# EAGLE board Circuit Diagram for PHY494 (EAGLE 9.7.0)

Size 253.6 x 350.01 mm. Coordinates in mm from the lower left corner, seen from the top.
Outline: 0,0 253.6,0 253.6,350.01 0,350.01 0,0
Copper layers (1*16): Top 0.035mm / dielectric 1.5mm / Bottom 0.035mm
Design rules "default": minimum track width 6mil, minimum drill 0.35mm, track to track 6mil, track to pad 6mil, pad to pad 6mil, via to via 6mil, smd to smd 6mil, copper to edge 40mil, drill to drill 6mil, minimum pad ring 10mil, minimum via ring 8mil, stop-mask expansion 4mil, vias tented up to drill 0mil, thermal gap 10mil

## Footprints (pad centres in the part's own frame; a part is rotated, then mirrored left to right if it is on the bottom)
HC-SR04 = drill 1.016 long: 1 -3.81,0; 2 -1.27,0; 3 1.27,0; 4 3.81,0
WS2812-STRIP = drill 1.016 long: 1 -3.81,0; 2 -1.27,0; 3 1.27,0; 4 3.81,0
RESAD1016W63L850D250B = drill 0.83 pad 1.43: 1 -5.08,0; 2 5.08,0
HA-06-SM065 = drill 1 pad 1.676: 1 -2.54,-2.54; 2 0,2.54; 3 2.54,-2.54
SWITCH-MOMENTARY-PTH-6.5MM = drill 1.016 pad 1.88: 1 -3.251,2.261; 2 3.251,2.261; 3 -3.251,-2.261; 4 3.251,-2.261
ARDUINO-UNO-R3-SHIELD = drill 1.016 pad 1.88: 3.3V 24.13,-2.54; 5V 24.13,0; A0 24.13,12.7; A1 24.13,15.24; A2 24.13,17.78; A3 24.13,20.32; A4 24.13,22.86; A5 24.13,25.4; AREF -24.13,-13.97; D2 -24.13,20.32; D3 -24.13,17.78; D4 -24.13,15.24; D5 -24.13,12.7; D6 -24.13,10.16; D7 -24.13,7.62; D8 -24.13,3.81; D9 -24.13,1.27; D10 -24.13,-1.27; D11 -24.13,-3.81; D12 -24.13,-6.35; D13 -24.13,-8.89; GND@0 24.13,2.54; GND@1 24.13,5.08; GND@2 -24.13,-11.43; IOREF 24.13,-7.62; NC 24.13,-10.16; RES 24.13,-5.08; RX -24.13,25.4; SCL -24.13,-19.05; SDA -24.13,-16.51; TX -24.13,22.86; VIN 24.13,7.62

## Placement (x,y rotation side)
DIST1  DISTANCE-SENSOR-4PINHC-SR04  [HC-SR04]  159.4,22.23 0 top
LED1  WS2812B_STRIP  [WS2812-STRIP]  147.54,341.76 180 top
LEDPOTENTIOMETER_STRIP  WS2812B_STRIP  [WS2812-STRIP]  79.29,209.82 0 top
R1  10k  [RESAD1016W63L850D250B]  244.63,289.94 180 top
RING1  WS2812B_STRIP  [WS2812-STRIP]  234.21,290.45 0 top
RPOTMOTORIZED_POT  10k  [HA-06-SM065]  108.66,273.23 0 top
SLARGE_BUTTON_  SWITCH_MOMENTARY  [SWITCH-MOMENTARY-PTH-6.5MM]  237.01,296.29 90 top
UARDUINO  ARDUINO-UNO-R3-SHIELD  [ARDUINO-UNO-R3-SHIELD]  47.88,141.9 270 top

## Library data of the parts
DIST1 LED1 LEDPOTENTIOMETER_STRIP R1 RING1 RPOTMOTORIZED_POT SLARGE_BUTTON_ UARDUINO = Tinkercad

## Nets
LEDPOTENTIOMETER_STRIP_DOUT: LED1.1 LEDPOTENTIOMETER_STRIP.4
UARDUINO_5V: DIST1.1 LED1.2 LEDPOTENTIOMETER_STRIP.2 RING1.2 RPOTMOTORIZED_POT.1 SLARGE_BUTTON_.1 SLARGE_BUTTON_.2 UARDUINO.5V
UARDUINO_A2: RPOTMOTORIZED_POT.2 UARDUINO.A2
UARDUINO_D2: R1.2 SLARGE_BUTTON_.3 SLARGE_BUTTON_.4 UARDUINO.D2
UARDUINO_D9: DIST1.2 UARDUINO.D9
UARDUINO_D10: DIST1.3 UARDUINO.D10
UARDUINO_D11: RING1.1 UARDUINO.D11
UARDUINO_D12: LEDPOTENTIOMETER_STRIP.1 UARDUINO.D12
UARDUINO_GND: DIST1.4 LED1.3 LEDPOTENTIOMETER_STRIP.3 R1.1 RING1.3 RPOTMOTORIZED_POT.3 UARDUINO.GND@0 UARDUINO.GND@1 UARDUINO.GND@2

## Tracks (layer width: path | path; a pad name or v marks a point on that pad's centre or on a via)
LEDPOTENTIOMETER_STRIP_DOUT  (1 unrouted)
UARDUINO_5V  (7 unrouted)
UARDUINO_A2  (1 unrouted)
UARDUINO_D2  (3 unrouted)
UARDUINO_D9  (1 unrouted)
UARDUINO_D10  (1 unrouted)
UARDUINO_D11  (1 unrouted)
UARDUINO_D12  (1 unrouted)
UARDUINO_GND  (8 unrouted)